# Altium PCB Nano-Arduino-LoRa.PcbDoc
Units mm, origin at the board's own origin, x right, y up, seen from the top; angles counter-clockwise.
Board outline 32.41 x 66.98 mm, 2 copper layers (Top Layer, Bottom Layer); 40 components, 28 nets, 157 pads, 205 vias.
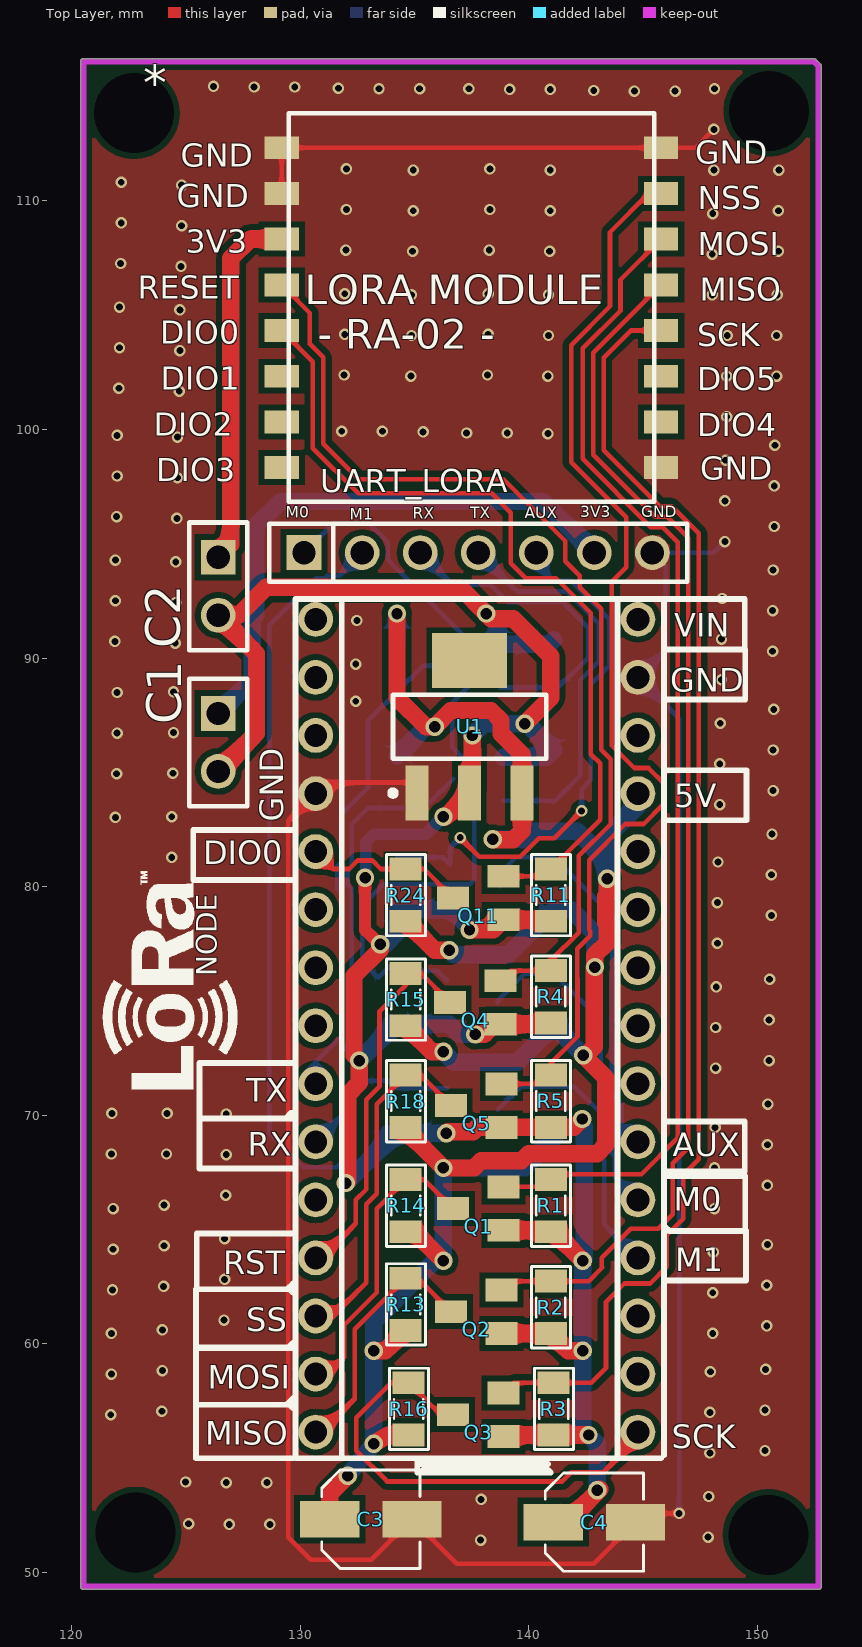
[diagram p0: Top Layer view]
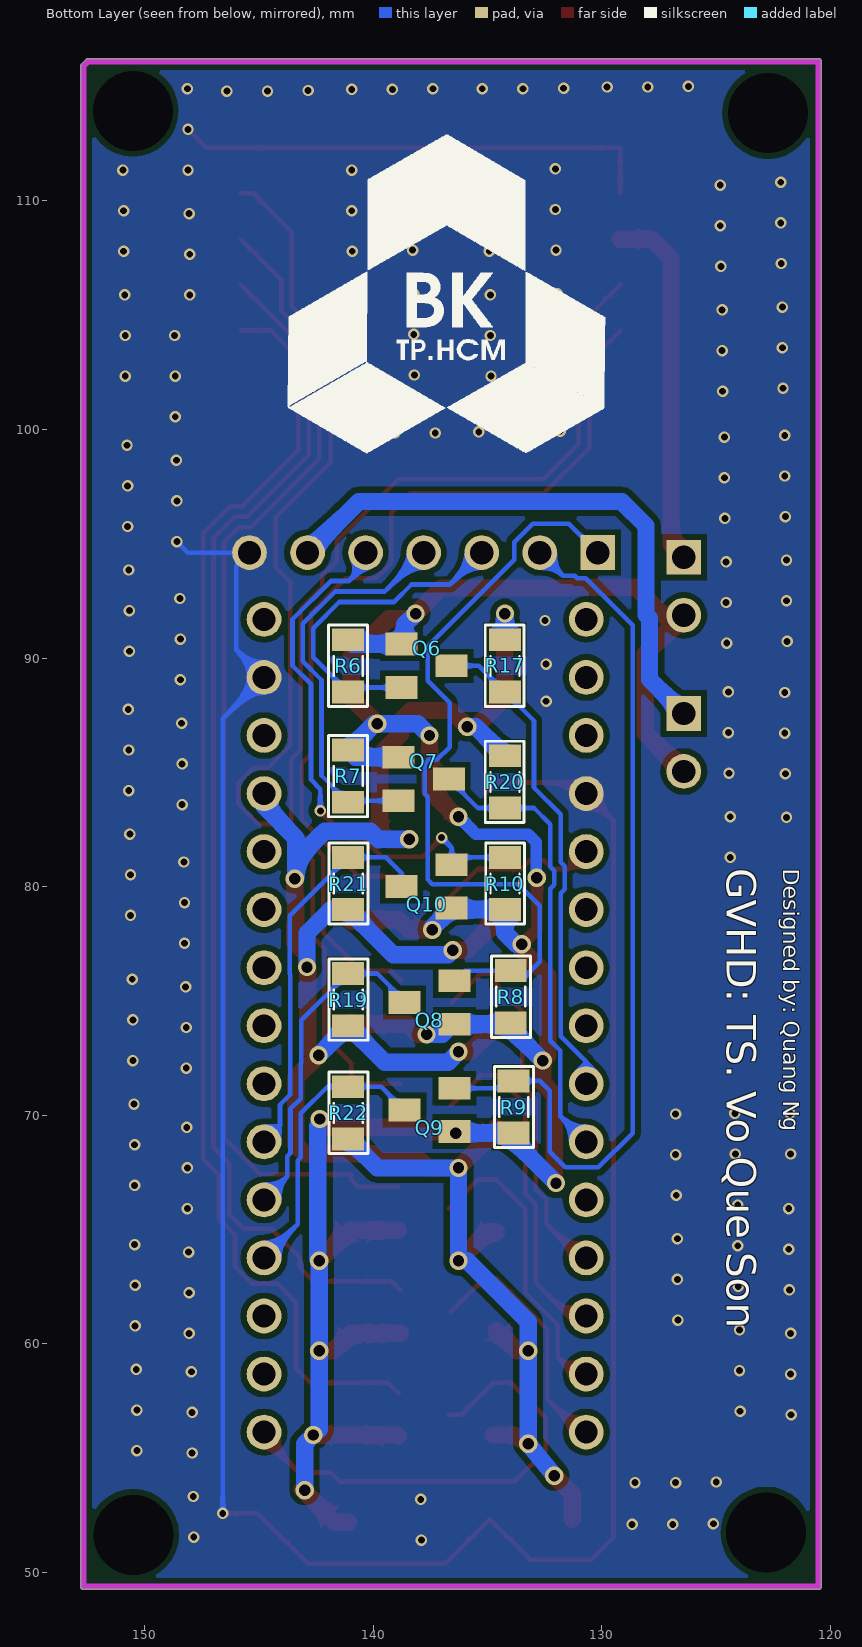
[diagram p1: Bottom Layer view, seen from below]
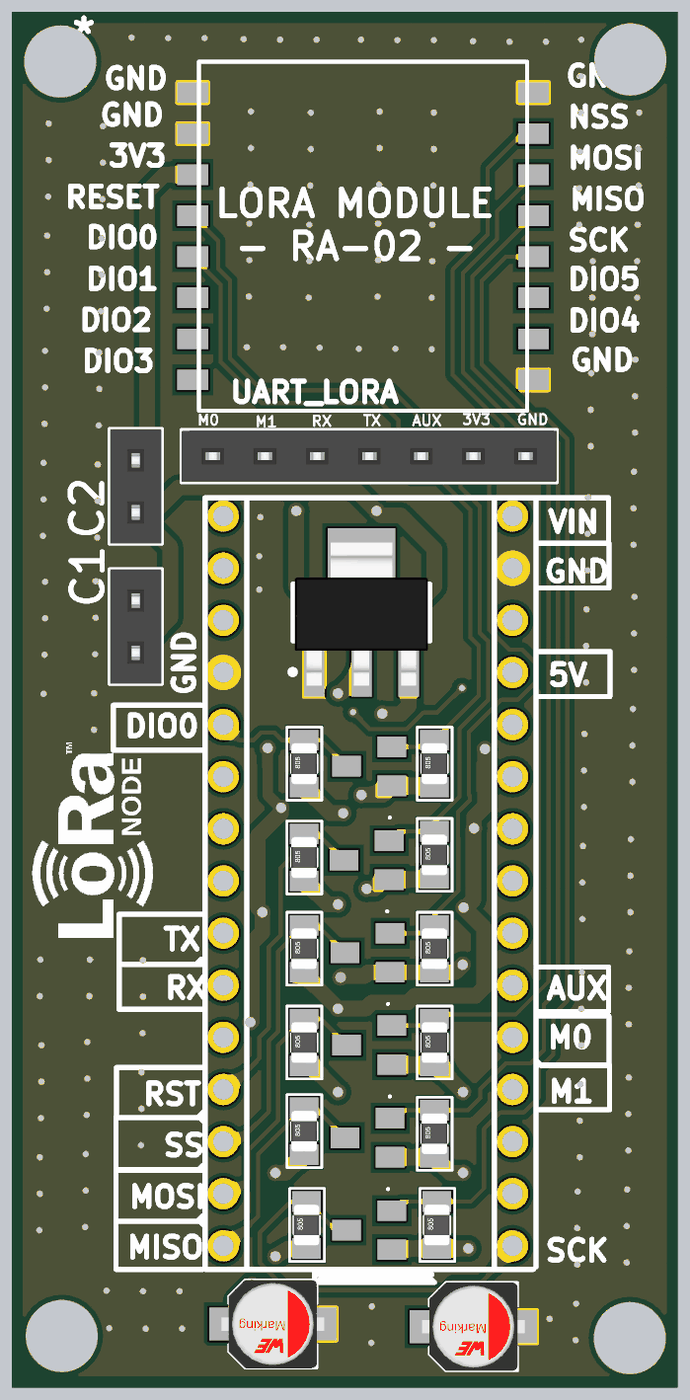
[diagram p2: 3D render of the assembled board from above, using the file's embedded part models]
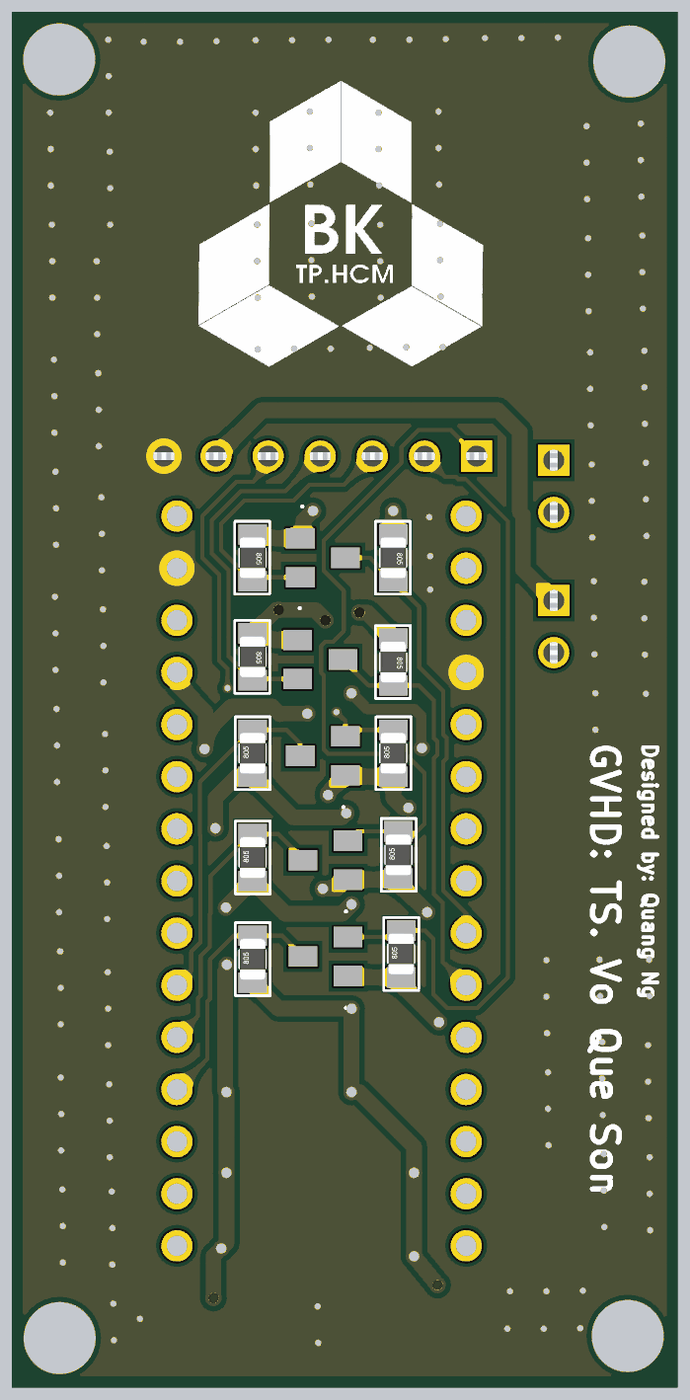
[diagram p3: 3D render of the assembled board from below, using the file's embedded part models]

## Layer stack, top to bottom
Top Solder: solder mask 0.0102, Solder Resist, Dk 3.5
Top Layer: signal copper 0.0356
Dielectric 1: dielectric 0.32, FR-4, Dk 4.8
Bottom Layer: signal copper 0.0356
Bottom Solder: solder mask 0.0102, Solder Resist, Dk 3.5

## Board outline
120.396,49.378 ccw(c120.523,49.378) 120.523,49.25 152.679,49.25 ccw(c152.679,49.378) 152.807,49.378 152.807,115.9 ccw(c152.679,115.9) 152.769,115.991 152.769,115.99 152.566,116.193 152.567,116.193 ccw(c152.476,116.103) 152.476,116.231 120.523,116.231 ccw(c120.523,116.103) 120.396,116.103

## Design rules (kind name [scope] priority, off if disabled: settings)
Clearance [All] p1: gap=0.254 ignorepadtopadclearanceinfootprint=FALSE except(0: Arc-Hole Track-Hole SMDPad-Hole THPad-Hole Via-Hole Fill-Hole Poly-Hole Region-Hole Text-Hole)
PlaneConnect [All] p1: planeconnectstyle=Direct reliefexpansion=0.508 reliefentries=4 reliefconductorwidth=0.254 reliefairgap=0.254
PolygonConnect [All] p1: connectstyle=Direct reliefconductorwidth=0.254 reliefentries=4 polygonreliefangle="90 Angle" airgapwidth=0.254
RoutingVias [All] p1: holewidth=0.711 width=1.27 viastyle="Through Hole" minholewidth=0.711 minwidth=1.27 maxholewidth=0.711 maxwidth=1.27
SolderMaskExpansion [All] p1: expansion=0.102
Width [All] p1: maxlimit=1.016 minlimit=0.203 preferedwidth=0.203 minimp=50.000000 maximp=50.000000 favimp=50.000000
29 further rules are at their usual default settings.

## Components (designator, comment, footprint, x,y, rotation, side; value= is the part's Value field where it differs from the comment)
* "RA-02" RA-02 137.353,106.555 r0 top
C1 "JP2" JP2-C1T 126.416,87.579 r270 top
C2 "JP2" JP2-C1T 126.416,94.412 r270 top
C3 "10uF" CAP-ALU-SMD-4.5x5x1.4 133.096,52.324 r0 top
C4 "10uF" CAP-ALU-SMD-4.5x5x1.4 142.875,52.197 r0 top
Q1 "BSS138" SOT-23-3L#1 137.795,65.913 r90 top
Q2 "BSS138" SOT-23-3L#1 137.711,61.402 r90 top
Q3 "BSS138" SOT-23-3L#1 137.795,56.896 r90 top
Q4 "BSS138" SOT-23-3L#1 137.668,74.93 r90 top
Q5 "BSS138" SOT-23-3L#1 137.711,70.419 r90 top
Q6 "BSS138" SOT-23-3L#2 137.668,89.662 r270 bottom
Q7 "BSS138" SOT-23-3L#2 137.795,84.709 r270 bottom
Q8 "BSS138" SOT-23-3L#2 137.541,74.93 r90 bottom
Q9 "BSS138" SOT-23-3L#2 137.541,70.231 r90 bottom
Q10 "BSS138" SOT-23-3L#2 137.668,80.01 r90 bottom
Q11 "BSS138" SOT-23-3L#1 137.795,79.502 r90 top
R1 "Res" RES-SMD-0805 140.97,66.04 r90 top
R2 "Res" RES-SMD-0805 140.97,61.595 r90 top
R3 "Res" RES-SMD-0805 141.097,57.15 r90 top
R4 "Res" RES-SMD-0805 140.97,75.184 r90 top
R5 "Res" RES-SMD-0805 140.97,70.612 r90 top
R6 "Res" RES-SMD-0805 141.097,89.662 r270 bottom
R7 "Res" RES-SMD-0805 141.097,84.836 r270 bottom
R8 "Res" RES-SMD-0805 133.985,75.184 r90 bottom
R9 "Res" RES-SMD-0805 133.858,70.358 r90 bottom
R10 "Res" RES-SMD-0805 134.239,80.137 r90 bottom
R11 "Res" RES-SMD-0805 140.97,79.629 r90 top
R13 "Res" RES-SMD-0805 134.62,61.722 r90 top
R14 "Res" RES-SMD-0805 134.62,66.04 r90 top
R15 "Res" RES-SMD-0805 134.62,75.057 r90 top
R16 "Res" RES-SMD-0805 134.747,57.15 r90 top
R17 "Res" RES-SMD-0805 134.239,89.662 r270 bottom
R18 "Res" RES-SMD-0805 134.62,70.612 r90 top
R19 "Res" RES-SMD-0805 141.097,75.057 r90 bottom
R20 "Res" RES-SMD-0805 134.239,84.582 r270 bottom
R21 "Res" RES-SMD-0805 141.097,80.137 r90 bottom
R22 "Res" RES-SMD-0805 141.097,70.104 r90 bottom
R24 "Res" RES-SMD-0805 134.62,79.629 r90 top
U1 "LM1117-3.3V" SOT223 137.414,86.995 r0 top
UART_LORA "JP7" JP7-C1T 130.175,94.615 r0 top

## Footprints (in the part's own frame and the unit in brackets; to place one, negate y for a bottom-side part, rotate by r counter-clockwise, add the part's x,y. Pads: shape width x height; smd on the part's side, far side on the other; paste and mask are expansions set on the pad)
CAP-ALU-SMD-4.5x5x1.4 [mm]
  rect 2.6x1.6 smd: 1(-1.8,0) 2(1.8,0)
  silkscreen extent -2.15,-2.15 2.15,2.15, body extent -2.5,-2.15 2.5,2.15, height 5.45
JP2-C1T [mm] "2 row, straight, gold plating"
  rect 1.52x1.52 hole 1.02: 1(0,0)
  round 1.52 hole 1.02: 2(2.54,0)
  silkscreen extent -1.52,-1.27 4.06,1.27, body extent -1.52,-1.25 4.06,1.25, height 8.51
JP7-C1T [mm] "7 row, straight, gold plating"
  rect 1.52x1.52 hole 1.02: 1(0,0)
  round 1.52 hole 1.02: 2(2.54,0) 3(5.08,0) 4(7.62,0) 5(10.16,0) 6(12.7,0) 7(15.24,0)
  silkscreen extent -1.52,-1.27 16.76,1.27, body extent -1.52,-1.25 16.76,1.25, height 8.51
RA-02 [mm]
  rect 1.5x1 smd: 1(-8.157,5.776) 2(-8.157,3.776) 3(-8.157,1.776) 4(-8.157,-0.224) 5(-8.157,-2.224) 6(-8.157,-4.224) 7(-8.157,-6.224) 8(-8.157,-8.224) 9(8.443,-8.224) 10(8.443,-6.224) 11(8.443,-4.224) 12(8.443,-2.224) 13(8.443,-0.224) 14(8.443,1.776) 15(8.443,3.776) 16(8.443,5.776)
  silkscreen extent -7.86,-9.72 8.14,7.28
RES-SMD-0805 [mil]
  rect 39.37x55 smd: 1(-45,0) 2(45,0)
  silkscreen extent -70,-34 70,33, body extent -39,-25 39,25, height 31
SOT223 [mm]
  rect 1x2.4 smd: 1(-2.3,-2.9) 2(0,-2.9) 3(2.3,-2.9)
  rect 3.3x2.4 smd: 4(0,2.9)
  silkscreen extent -3.47,-3.02 3.35,1.4, body extent -3.25,-3.56 3.25,3.4, height 1.68
SOT-23-3L#1 [mm] "SOT-23-3Las used in BSS138"
  round 0.2 on Top Overlay: 1(-2.5,-1)
  rect 1x1.4 smd: 1(-0.95,-1.1) 2(0.95,-1.1) 3(0,1.1)
SOT-23-3L#2 [mm] "SOT-23-3Las used in BSS138"
  round 0.2 on Bottom Overlay: 1(-2.5,-1)
  rect 1x1.4 smd: 1(-0.95,-1.1) 2(0.95,-1.1) 3(0,1.1)

## Part data
C1 C2: "WR-PHD 2.54 mm Angled Socket Header", Manufacturer="Würth Elektronik eiSos GmbH", partNo=613002143121, ComponentLink1 Description=Manufacturer, ComponentLink1URL=http://www.we-online.com, ComponentLink2 Description=Datasheet, ComponentLink2URL=http://katalog.we-online.de/em/datasheet/6130xx143121.pdf, Created by="Karrer Zheng", Created Date="29 March 2013", NoPins=02
C3 C4: library part CN-ALU-SMD, "Polarized Capacitor (Axial)", LatestRevisionDate=17-Jul-2002, LatestRevisionNote="Re-released for DXP Platform.", PackageReference=POLAR0.8, Published=8-Jun-2000, Publisher="Altium Limited"
Q1 Q2 Q3 Q4 Q5 Q6 Q7 Q8 Q9 Q10 Q11: "FET SM NCH 50V 220mA SOT23-3L", Id=220mA, Type=NMOS, Vdss=50V
R1 R2 R3 R4 R5 R6 R7 R8 R9 R10 R11 R13 R14 R15 R16 R17 R18 R19 R20 R21 R22 R24: library part Res-SMD, "Resistor", Manufacturer="Generic Components", Class=Passive, Published=08/06/2000, Publisher="Altium Hobart Technology Centre"
U1: library part LM1117, "800mA Low-Dropout Linear Regulator", Creator="Nguyen Ba Bien", Website=http://group3i.net
UART_LORA: "WR-PHD 2.54 mm Angled Socket Header", Manufacturer="Würth Elektronik eiSos GmbH", partNo=613007143121, ComponentLink1 Description=Manufacturer, ComponentLink1URL=http://www.we-online.com, ComponentLink2 Description=Datasheet, ComponentLink2URL=http://katalog.we-online.de/em/datasheet/6130xx143121.pdf, Created by="Karrer Zheng", Created Date="29 March 2013", NoPins=07

## Free pads (board coordinates)
  round 1.524 hole 1: 31(130.683,81.534) 31(144.78,81.534) 32(130.683,61.214) 32(130.683,71.374) 32(130.683,84.074) 32(144.78,61.214) 32(144.78,71.374) 32(144.78,84.074) 33(130.683,56.134) 33(130.683,63.754) 33(130.683,73.914) 33(130.683,86.614) 33(144.78,56.134) 33(144.78,63.754) 33(144.78,73.914) 33(144.78,86.614) 34(130.683,58.674) 34(130.683,66.294) 34(130.683,76.454) 34(130.683,89.154) 34(144.78,58.674) 34(144.78,66.294) 34(144.78,76.454) 34(144.78,89.154) 35(130.683,68.834) 35(130.683,78.994) 35(130.683,91.694) 35(144.78,68.834) 35(144.78,78.994) 35(144.78,91.694)
  round 1.524 hole 3.5: 36(122.733,113.843) 36(122.809,51.74) 36(150.52,113.944) 37(150.495,51.638)

## Via types
v1: diameter 0.5, hole 0.3, Top Layer to Bottom Layer, tented both sides, 176 vias
v2: diameter 0.8, hole 0.5, Top Layer to Bottom Layer, tented both sides, 29 vias

## Nets (pads, with @x,y where several pads share a name; then routed paths per layer and width w, separated by ;. In a path a pad name is that pad's centre, name@x,y a point inside that pad or via, vN(x,y) a via of type N, cw(c..) or ccw(c..) an arc to the next point about the centre after c; other vN are vias at no path point)
+3V3: C1.2 C2.2 C4.1 Q1.1@138.895,64.963 Q2.1@138.811,60.452 Q3.1@138.895,55.946 Q4.1@138.768,73.98 Q5.1@138.811,69.469 Q6.1@138.768,90.612 Q7.1@138.895,85.659 Q8.1@136.441,73.98 Q9.1@136.441,69.281 Q10.1@136.568,79.06 Q11.1@138.895,78.552 R1.1 R2.1 R3.1 R4.1 R5.1 R6.1 R7.1 R8.1 R9.1 R10.1 R11.1 U1.2 | length 123.6
  Top Layer w0.508: v2(132.842,80.391) 132.842,78.105 133.466,77.481 v2(133.502,77.481)
  Top Layer w0.762: C1.2 128.092,86.716 128.092,90.195 C2.2 127.305,91.872 128.524,93.091 131.262,93.091 131.287,93.066 137.033,93.066 v2(138.15,91.948) 138.368,91.73 139.327,91.73 140.97,90.087 140.97,88.265 v2(139.827,87.122) ; v2(132.004,67.031) 132.08,67.107 132.08,70.903 132.588,71.411 v2(132.588,72.39) 132.359,72.619 132.359,76.098 133.502,77.241 v2(133.502,77.481) ; v2(136.271,83.058) 136.377,83.058 U1.2 137.541,84.222 v2(137.541,86.614) ; v2(136.398,69.215) 136.467,69.284 137.574,69.284 137.759,69.469 138.811,69.469 141.984,69.469 v2(142.348,69.833) ; v2(137.414,78.105) 138.448,78.105 138.895,78.552 140.904,78.552 R11.1 ; v2(137.668,73.533) 138.049,73.533 138.496,73.98 138.768,73.98 140.909,73.98 R4.1 ; Q2.1@138.811,60.452 R2.1 141.732,59.69 v2(142.367,59.69) ; Q3.1@138.895,55.946 138.956,56.007 R3.1 v2(142.621,56.007) ; Q1.1@138.895,64.963 141.031,64.963 v2(142.367,63.627) ; C4.1 141.677,52.197 v2@143.112,53.632
  Bottom Layer w0.508: v2(132.842,80.391) 132.981,80.391 132.867,80.505 132.867,81.94 133.223,82.296 135.509,82.296 v2(136.271,83.058)
  Bottom Layer w0.762: v2(132.004,67.031) 133.858,68.885 R9.1 v2(136.398,69.215) ; v2(132.588,72.39) 133.985,73.787 R8.1 134.046,73.98 136.441,73.98 136.526,73.98 136.973,73.533 v2(137.668,73.533) ; v2(133.502,77.481) 133.742,77.481 134.239,77.978 R10.1 136.502,78.994 136.568,79.06 137.414,78.214 v2(137.414,78.105) ; v2(137.541,86.614) 138.049,87.122 v2(139.827,87.122) 139.954,87.122 R7.1 140.777,85.659 Q7.1@138.895,85.659 ; v2(138.15,91.948) 138.615,91.483 138.615,90.765 138.768,90.612 140.904,90.612 R6.1 ; v2@142.43,69.513 142.43,63.691 v2(142.367,63.627) v2(142.367,59.69) 142.367,56.261 v2(142.621,56.007) ; v2@142.875,55.753 143.002,55.626 v2(143.002,53.594)
+5: C3.1 pad.32@144.78,84.074 R13.1 R14.1 R15.1 R16.1 R17.1 R18.1 R19.1 R20.1 R21.1 R22.1 R24.1 U1.3 | length 101.5
  Top Layer w0.762: C3.1 131.296,53.445 v2(132.08,54.229) ; v2(133.223,55.626) 133.858,56.007 R16.1 ; v2(133.223,59.69) 133.731,59.69 R13.1 ; v2(134.239,91.948) 134.239,88.265 135.509,86.995 v2(135.89,86.995) 136.601,87.706 138.354,87.706 138.792,87.268 138.792,86.693 139.714,85.771 U1.3 139.714,82.437 139.321,82.044 138.432,82.044 138.43,82.046 v2(138.43,82.067) ; R14.1 135.001,64.897 v2(136.271,63.627) ; R18.1 134.62,69.342 v2(136.271,67.691) 137.625,67.691 137.932,67.998 139.689,67.998 140.008,68.318 142.994,68.318 143.383,68.707 143.383,71.628 v2(142.392,72.619) 142.494,72.619 142.875,72.999 142.875,76.454 v2(142.9,76.479) 142.9,77.014 143.434,77.548 143.434,78.365 143.383,78.415 143.383,79.573 143.434,79.623 v2(143.434,80.34) ; R15.1 135.763,72.771 v2(136.271,72.771) ; R24.1 135.89,77.216 v2(136.525,77.216)
  Bottom Layer w0.762: v2(132.08,54.229) v2(133.223,55.626) v2(133.223,59.69) 133.223,60.96 135.89,63.627 v2(136.271,63.627) v2(136.271,67.691) 139.827,67.691 R22.1 ; R20.1 135.509,86.995 v2(135.89,86.995) ; R17.1 v2(134.239,91.948) ; v2(136.271,72.771) 136.726,72.316 139.499,72.316 R19.1 v2(142.392,72.619) ; v2(136.525,77.216) 136.726,77.015 139.118,77.015 R21.1 141.859,78.994 142.9,77.953 v2(142.9,76.479) ; v2(138.43,82.067) 139.737,82.067 139.763,82.042 140.135,82.415 142.121,82.415 143.383,81.153 ; v2(143.434,80.34) 143.383,80.391 143.383,81.153 ; pad.32@144.78,84.074 144.78,83.51 143.383,82.113 143.383,81.153
AUX_3: Q10.2 R10.2 UART_LORA.5 | length 23.9
  Top Layer w0.203: v1(137.008,82.144) 137.844,81.308 139.626,81.308 140.437,82.118 141.122,82.118 v1(142.316,83.312)
  Bottom Layer w0.203: R10.2 136.248,81.28 Q10.2 136.568,81.704 v1(137.008,82.144) ; UART_LORA.5 140.335,94.107 141.072,93.37 141.857,93.37 143.535,91.692 143.535,89.664 142.723,88.851 142.723,84.672 142.316,84.266 v1(142.316,83.312)
AUX_5: pad.35@144.78,68.834 Q10.3 R21.2 | length 17.2
  Bottom Layer w0.203: Q10.3 138.768,80.602 139.446,81.28 R21.2 143.656,78.721 143.656,76.166 143.637,76.147 143.637,70.906 144.082,70.462 144.082,69.532 pad.35@144.78,68.834
CS_3: *.15 Q5.2 R5.2 | length 48
  Top Layer w0.203: Q5.2 140.584,71.369 R5.2 140.97,72.265 142.138,73.433 142.138,75.995 142.119,76.014 142.119,77.275 142.697,77.853 142.697,78.059 142.646,78.11 142.646,81.155 144.233,82.742 145.028,82.742 145.898,83.611 145.898,84.537 145.243,85.192 144.622,85.192 143.637,86.176 143.637,93.345 144.272,93.98 144.272,96.162 141.859,98.575 141.859,103.687 143.561,105.389 143.561,108.636 145.256,110.331 *.15
CS_5: pad.32@130.683,61.214 Q5.3 R18.2 | length 15.1
  Top Layer w0.203: pad.32@130.683,61.214 pad.32@131.191,61.214 ; pad.32@131.318,61.087 132.893,62.662 132.893,66.102 133.35,66.56 133.35,70.485 R18.2 135.275,71.755 Q5.3
DIO0_5: pad.31@130.683,81.534 Q11.3 R24.2 | length 7.2
  Top Layer w0.203: pad.31@130.683,81.534 131.445,80.772 132.154,80.772 132.529,81.147 133.155,81.147 133.53,80.772 R24.2 135.425,80.772 Q11.3
DIO_3: *.5 Q11.2 R11.2 | length 36.6
  Top Layer w0.203: *.5 130.556,102.971 130.556,99.187 132.538,97.205 138.38,97.205 139.219,96.366 139.219,94.153 139.873,93.499 141.197,93.499 142.723,91.973 142.723,85.798 143.129,85.391 143.129,82.931 R11.2 140.65,80.452 Q11.2
GND: *.1 *.2 *.9 *.16 C3.2 C4.2 pad.32@130.683,84.074 pad.34@144.78,89.154 U1.1 UART_LORA.7 | length 126
  Top Layer w0.203: *.2 *.1 *.16 147.307,112.331 v1(148.107,113.132) ; U1.1 134.652,84.557 131.166,84.557 130.683,84.074 129.489,82.88 129.489,51.528 130.471,50.546 133.118,50.546 C3.2 136.852,50.368 142.846,50.368 C4.2 145.056,52.578 v1(146.583,52.578)
  Bottom Layer w0.203: v1(146.583,52.578) 146.583,87.351 144.78,89.154 145.999,90.373 145.999,94.031 UART_LORA.7 148.107,94.615 v1(148.59,95.098)
  other v1: 137.897,51.41 147.853,51.537 126.898,52.095 128.676,52.095 125.12,52.121 137.922,53.188 147.879,53.315 126.771,53.924 128.549,53.924 124.993,53.95 147.93,55.22 150.343,55.321 121.717,56.896 147.93,56.998 123.952,57.048 150.343,57.099 121.742,58.674 147.955,58.776 123.977,58.826 150.368,58.877 121.742,60.452 148.057,60.452 123.977,60.604 150.419,60.782 126.67,61.036 148.057,62.23 121.793,62.357 124.028,62.509 150.419,62.56 126.695,62.814 148.082,64.008 121.818,64.135 124.054,64.287 150.444,64.338 126.695,64.592 121.818,65.913 148.133,65.913 124.054,66.065 126.746,66.497 150.444,66.929 148.133,67.691 126.771,68.275 121.742,68.301 124.155,68.301 150.444,68.707 148.158,69.469 126.771,70.053 121.768,70.079 124.181,70.079 150.47,70.485 148.184,72.06 150.52,72.39 148.184,73.838 150.52,74.168 148.209,75.616 150.546,75.946 148.26,77.521 150.622,78.74 148.26,79.299 150.622,80.518 148.285,81.077 124.384,81.28 150.647,82.296 121.92,83.033 124.384,83.058 148.361,83.591 150.698,84.201 121.971,84.938 124.435,84.963 148.361,85.369 150.698,85.979 121.996,86.716 124.46,86.741 148.387,87.147 150.724,87.757 132.436,88.113 121.996,88.494 124.46,88.519 148.438,89.052 132.436,89.738 150.673,90.297 124.536,90.653 121.895,90.729 148.438,90.83 132.486,91.643 150.673,92.075 124.562,92.431 121.92,92.507 148.463,92.608 150.698,93.853 124.562,94.209 121.92,94.285 150.749,95.758 124.612,96.114 121.971,96.19 148.59,96.876 150.749,97.536 124.638,97.892 121.996,97.968 148.615,98.654 150.774,99.314 124.638,99.67 121.996,99.746 140.843,99.822 137.287,99.847 139.065,99.847 135.382,99.898 131.826,99.924 133.604,99.924 148.666,100.559 124.714,101.676 122.072,101.803 134.849,102.337 140.843,102.337 148.666,102.337 150.851,102.337 131.928,102.387 138.201,102.387 124.739,103.454 122.098,103.581 134.874,104.115 140.868,104.115 148.692,104.115 150.851,104.115 131.953,104.165 138.227,104.165 124.739,105.232 122.098,105.359 134.874,105.893 140.868,105.893 148.031,105.893 150.876,105.893 131.953,105.943 138.227,105.943 124.79,107.137 122.149,107.264 148.031,107.671 134.925,107.798 140.919,107.798 150.927,107.798 132.004,107.848 138.278,107.848 124.816,108.915 122.174,109.042 148.057,109.449 134.95,109.576 140.945,109.576 150.927,109.576 132.029,109.626 138.303,109.626 124.816,110.693 122.174,110.82 134.95,111.354 140.945,111.354 148.107,111.354 150.952,111.354 132.029,111.404 138.303,111.404 144.628,114.808 146.406,114.808 142.85,114.833 139.167,114.884 140.945,114.884 133.452,114.91 135.23,114.91 137.389,114.91 148.133,114.91 131.674,114.935 127.991,114.986 129.769,114.986 126.213,115.011
M0_3: Q8.2 R8.2 UART_LORA.1 | length 34.5
  Bottom Layer w0.203: UART_LORA.1 131.445,95.885 133.023,95.885 133.831,95.077 133.831,94.311 137.624,90.518 137.624,89.015 136.652,88.043 136.652,86.106 137.193,85.565 137.542,85.565 137.751,85.356 137.751,84.062 137.624,83.935 137.624,80.313 137.415,80.104 133.648,80.104 132.715,79.171 132.715,76.708 133.413,76.01 133.985,76.581 R8.2 135.994,76.327 Q8.2
M0_5: pad.34@144.78,66.294 Q8.3 R19.2 | length 14.5
  Bottom Layer w0.203: Q8.3 138.641,75.014 139.827,76.2 R19.2 143.148,74.149 143.148,72.306 143.18,72.274 143.18,70.717 143.624,70.272 143.624,68.339 143.764,68.199 143.764,67.31 pad.34@144.78,66.294
M1_3: Q9.2 R9.2 UART_LORA.2 | length 39.3
  Bottom Layer w0.203: UART_LORA.2 131.699,93.599 131.182,93.599 131.082,93.499 130.71,93.499 128.651,91.44 128.651,69.215 130.15,67.716 131.597,67.716 132.283,68.402 132.283,71.069 132.715,71.501 R9.2 134.178,71.181 Q9.2
M1_5: pad.33@144.78,63.754 Q9.3 R22.2 | length 12.4
  Bottom Layer w0.203: Q9.3 139.657,71.247 R22.2 142.003,71.247 143.167,70.083 143.167,68.149 143.307,68.01 143.307,65.227 pad.33@144.78,63.754
MISO_3: *.13 Q2.2 R2.2 | length 53.3
  Top Layer w0.203: Q2.2 139.197,62.738 R2.2 142.621,62.738 143.218,63.335 143.205,63.348 143.205,63.76 144.469,65.024 145.669,65.024 146.304,65.659 146.304,67.896 146.988,68.58 146.988,95.266 146.066,96.188 145.54,96.188 142.824,98.903 142.824,103.359 *.13
MISO_5: pad.33@130.683,56.134 Q2.3 R13.2 | length 11
  Top Layer w0.203: pad.33@130.81,56.007 132.385,57.582 132.385,60.63 R13.2 135.148,62.865 Q2.3
MOSI_3: *.14 Q1.2 R1.2 | length 51.4
  Top Layer w0.203: Q1.2 140.65,66.863 R1.2 140.97,67.412 144.938,67.412 146.531,69.004 146.531,95.077 145.877,95.731 145.35,95.731 142.367,98.714 142.367,103.549 144.018,105.2 144.018,106.553 *.14
MOSI_5: pad.34@130.683,58.674 Q1.3 R14.2 | length 13
  Top Layer w0.203: pad.34@130.683,58.674 pad.34@130.937,58.674 ; pad.34@131.064,58.547 131.928,59.411 131.928,60.819 133.35,62.242 133.35,65.913 R14.2 135.425,67.183 Q1.3
Net*_3: *.3 C2.1 | length 15.9
  Top Layer w0.762: C2.1 126.975,94.971 126.975,107.495 127.811,108.331 *.3
NetC1_1: C1.1 UART_LORA.6 | length 25.1
  Bottom Layer w0.203: C1.1 C1.1@126.441,87.605
  Bottom Layer w0.762: C1.1@126.441,87.605 127.914,89.078 127.914,91.745 128.067,91.898 128.067,95.783 129.134,96.85 140.64,96.85 UART_LORA.6
RST_3: *.4 Q4.2 R4.2 | length 43.1
  Top Layer w0.203: *.4 130.429,105.098 130.429,103.745 131.013,103.16 131.013,99.376 132.562,97.828 138.9,97.828 141.605,95.123 141.605,94.234 142.24,93.599 142.24,93.103 143.18,92.163 143.18,85.987 143.586,85.581 143.586,82.742 142.189,81.345 142.189,77.991 140.97,76.772 R4.2 139.215,76.327 Q4.2
RST_5: pad.33@130.683,63.754 Q4.3 R15.2 | length 16.6
  Top Layer w0.203: pad.33@130.81,63.627 132.436,65.253 132.436,66.292 132.893,66.749 132.893,70.674 133.477,71.259 133.477,74.549 134.62,75.692 R15.2 135.298,76.2 Q4.3
RX_3: Q7.2 R7.2 UART_LORA.4 | length 17.4
  Bottom Layer w0.203: UART_LORA.4 139.497,92.913 141.667,92.913 143.078,91.502 143.078,89.854 142.265,89.041 142.265,84.861 R7.2 141.031,83.759 Q7.2
RX_5: pad.35@130.683,68.834 Q7.3 R20.2 | length 19.9
  Bottom Layer w0.203: pad.35@130.683,68.834 131.826,69.977 131.826,72.83 132.258,73.262 132.258,79.907 132.086,80.078 132.086,80.704 132.258,80.875 132.258,82.728 132.969,83.439 R20.2 135.425,83.439 Q7.3
SCK_3: *.12 Q3.2 R3.2 | length 56.5
  Top Layer w0.203: Q3.2 139.342,58.293 R3.2 142.748,58.293 143.383,58.928 143.383,61.824 144.196,62.636 145.313,62.636 146.05,63.373 146.05,64.758 146.761,65.47 146.761,67.388 147.445,68.072 147.445,95.456 146.256,96.645 145.729,96.645 143.281,99.093 143.281,103.149 144.463,104.331 *.12
SCK_5: pad.33@144.78,56.134 Q3.3 R16.2 | length 20.7
  Top Layer w0.203: Q3.3 136.144,56.896 R16.2 133.985,58.293 132.461,56.769 132.461,55.319 133.805,53.975 141.478,53.975 141.872,54.369 143.269,54.369 pad.33@144.907,56.007
TX_3: Q6.2 R6.2 UART_LORA.3 | length 14.6
  Bottom Layer w0.203: UART_LORA.3 136.652,93.218 138.328,93.218 139.09,92.456 141.478,92.456 142.621,91.313 142.621,90.043 R6.2 140.904,88.712 Q6.2
TX_5: pad.32@130.683,71.374 Q6.3 R17.2 | length 21.6
  Bottom Layer w0.203: pad.32@130.683,71.374 130.683,72.333 131.801,73.451 131.801,79.717 131.629,79.889 131.629,80.893 131.801,81.065 131.801,83.16 132.969,84.328 132.969,87.249 R17.2 135.382,89.662 Q6.3
V_IN: pad.35@144.78,91.694
pads on no net: *.6 *.7 *.8 *.10 *.11 Q1.1@138.795,63.413 Q2.1@138.711,58.902 Q3.1@138.795,54.396 Q4.1@138.668,72.43 Q5.1@138.711,67.919 Q6.1@138.668,92.162 Q7.1@138.795,87.209 Q8.1@136.541,72.43 Q9.1@136.541,67.731 Q10.1@136.668,77.51 Q11.1@138.795,77.002 U1.4
copper on no net: | length 0.8
  Top Layer w0.203: 144.78,58.674 145.034,58.674 ; 144.78,61.214 145.288,61.214

## Polygon pours and split planes (outlines as drawn)
GND on Top Layer "GND_L01_P003" (solid, pour order 3): 120.396,49.378 ccw(c120.523,49.378) 120.523,49.25 152.679,49.25 ccw(c152.679,49.378) 152.807,49.378 152.807,115.9 ccw(c152.679,115.9) 152.769,115.991 152.769,115.99 152.566,116.193 152.567,116.193 ccw(c152.476,116.103) 152.476,116.231 120.523,116.231 ccw(c120.523,116.103) 120.396,116.103
GND on Bottom Layer "GND_L02_P004" (solid, pour order 4): 120.396,49.378 ccw(c120.523,49.378) 120.523,49.25 152.679,49.25 ccw(c152.679,49.378) 152.807,49.378 152.807,115.9 ccw(c152.679,115.9) 152.769,115.991 152.769,115.99 152.566,116.193 152.567,116.193 ccw(c152.476,116.103) 152.476,116.231 120.523,116.231 ccw(c120.523,116.103) 120.396,116.103

## Keep-outs
Keep-Out Layer:
  lines w0.254: 120.523,49.378 120.523,116.103 152.476,116.103 152.679,115.9 152.679,49.378 151.536,49.378 ; 120.523,49.378 151.536,49.378 ; 120.523,49.378 151.536,49.378

## Silkscreen, mask and mechanical layers (free items; w line width, h text height)
Top Overlay:
  drawing of 69 lines, arcs and shapes, not listed
  text "3V3" at 142.265,96.164 h0.5
  text "GND" at 144.932,96.164 h0.5
  text "M0" at 129.362,96.139 h0.5
  text "TX" at 137.439,96.114 h0.5
  text "AUX" at 139.827,96.114 h0.5
  text "RX" at 134.925,96.088 h0.5
  text "M1" at 132.182,96.063 h0.5
  text "VIN" at 146.38,90.932 h1.02
  text "GND" at 146.202,88.519 h1.02
  text "5V" at 146.38,83.464 h1.02
  text "GND" at 129.261,82.829 h1.02 r90
  text "DIO0" at 125.755,80.975 h1.02
  text "NODE" at 126.67,76.073 h1.52 r90
  text "TX" at 127.635,70.587 h1.02
  text "RX" at 127.711,68.224 h1.02
  text "AUX" at 146.304,68.199 h1.02
  text "M0" at 146.355,65.811 h1.02
  text "M1" at 146.406,63.17 h1.02
  text "RST" at 126.644,63.043 h1.02
  text "SS" at 127.635,60.554 h1.02
  text "MOSI" at 125.959,58.039 h1.02
  text "MISO" at 125.857,55.575 h1.02
  text "SCK" at 146.253,55.423 h1.02
Bottom Overlay:
  drawing of 13 lines, arcs and shapes, not listed
  text "GVHD: TS. Vo Que Son" at 124.536,80.797 h1.3 r90
  text "Designed by: Quang Ng" at 122.072,80.772 h0.7 r90

## Text inside footprints (layer, text, board x,y; h text height)
*: Top Overlay "LORA MODULE /  - RA-02 -" at 130.196,103.531 h1.3; Top Overlay "GND" at 147.296,111.631 h1; Top Overlay "NSS" at 147.396,109.631 h1; Top Overlay "MOSI" at 147.396,107.631 h1; Top Overlay "MISO" at 147.496,105.631 h1; Top Overlay "SCK" at 147.386,103.634 h1; Top Overlay "DIO5" at 147.386,101.729 h1; Top Overlay "DIO4" at 147.386,99.697 h1; Top Overlay "GND" at 147.513,97.792 h1; Top Overlay "DIO3" at 123.696,97.731 h1; Top Overlay "DIO2" at 123.596,99.731 h1; Top Overlay "DIO1" at 123.896,101.731 h1; Top Overlay "DIO0" at 123.891,103.761 h1; Top Overlay "RESET" at 122.896,105.731 h1; Top Overlay "3V3" at 124.996,107.731 h1; Top Overlay "GND" at 124.596,109.731 h1; Top Overlay "GND" at 124.78,111.508 h1